# EAGLE board board (EAGLE 9.6.2)
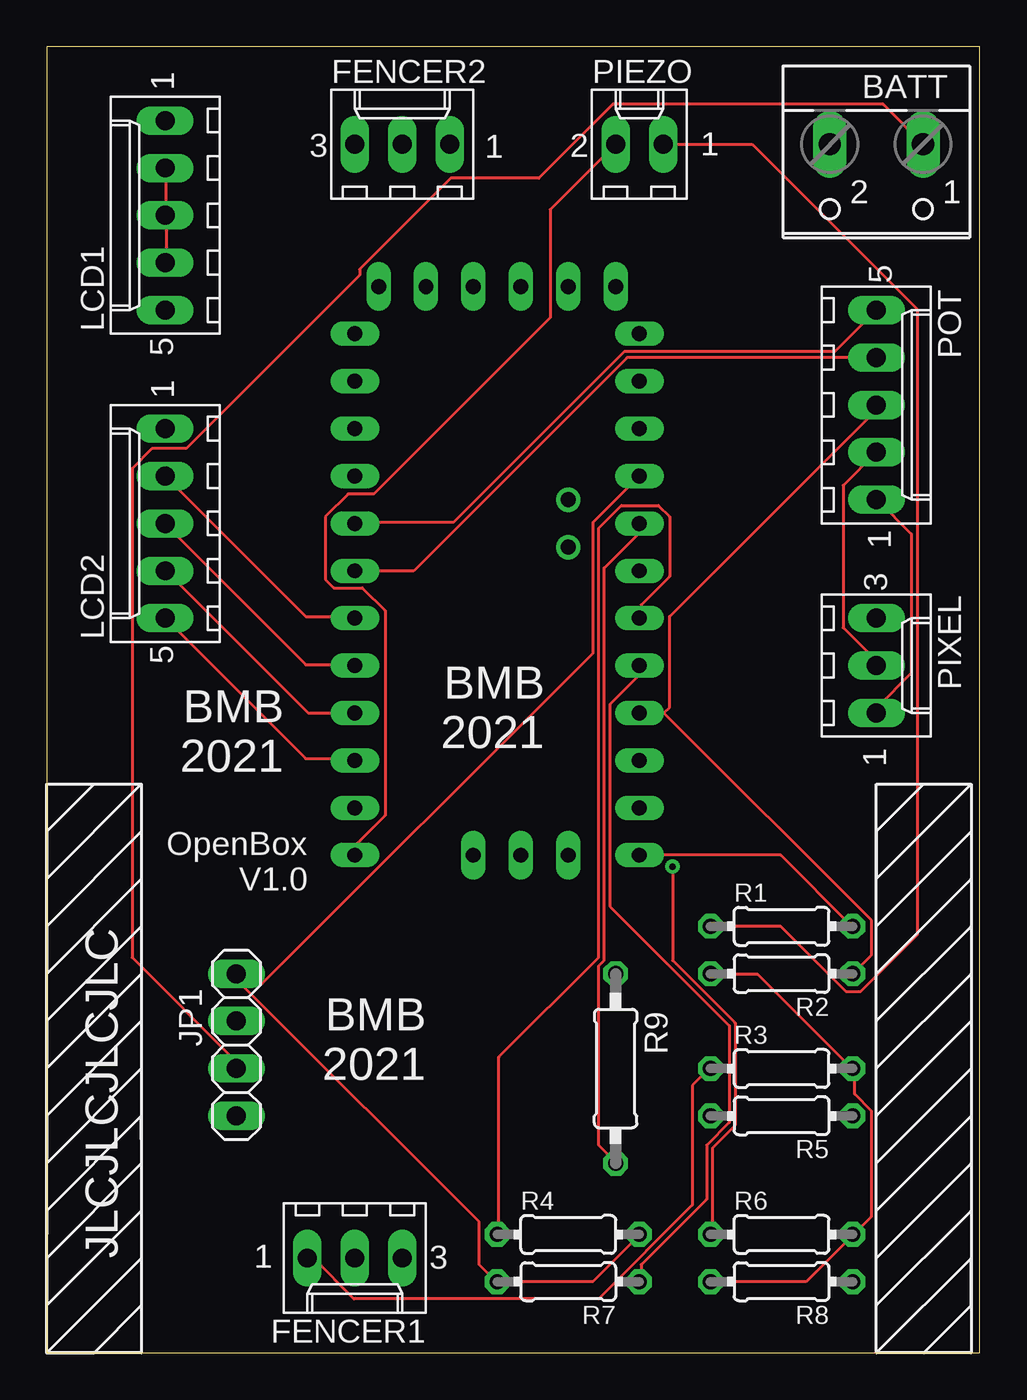
[diagram p0: board, top side]
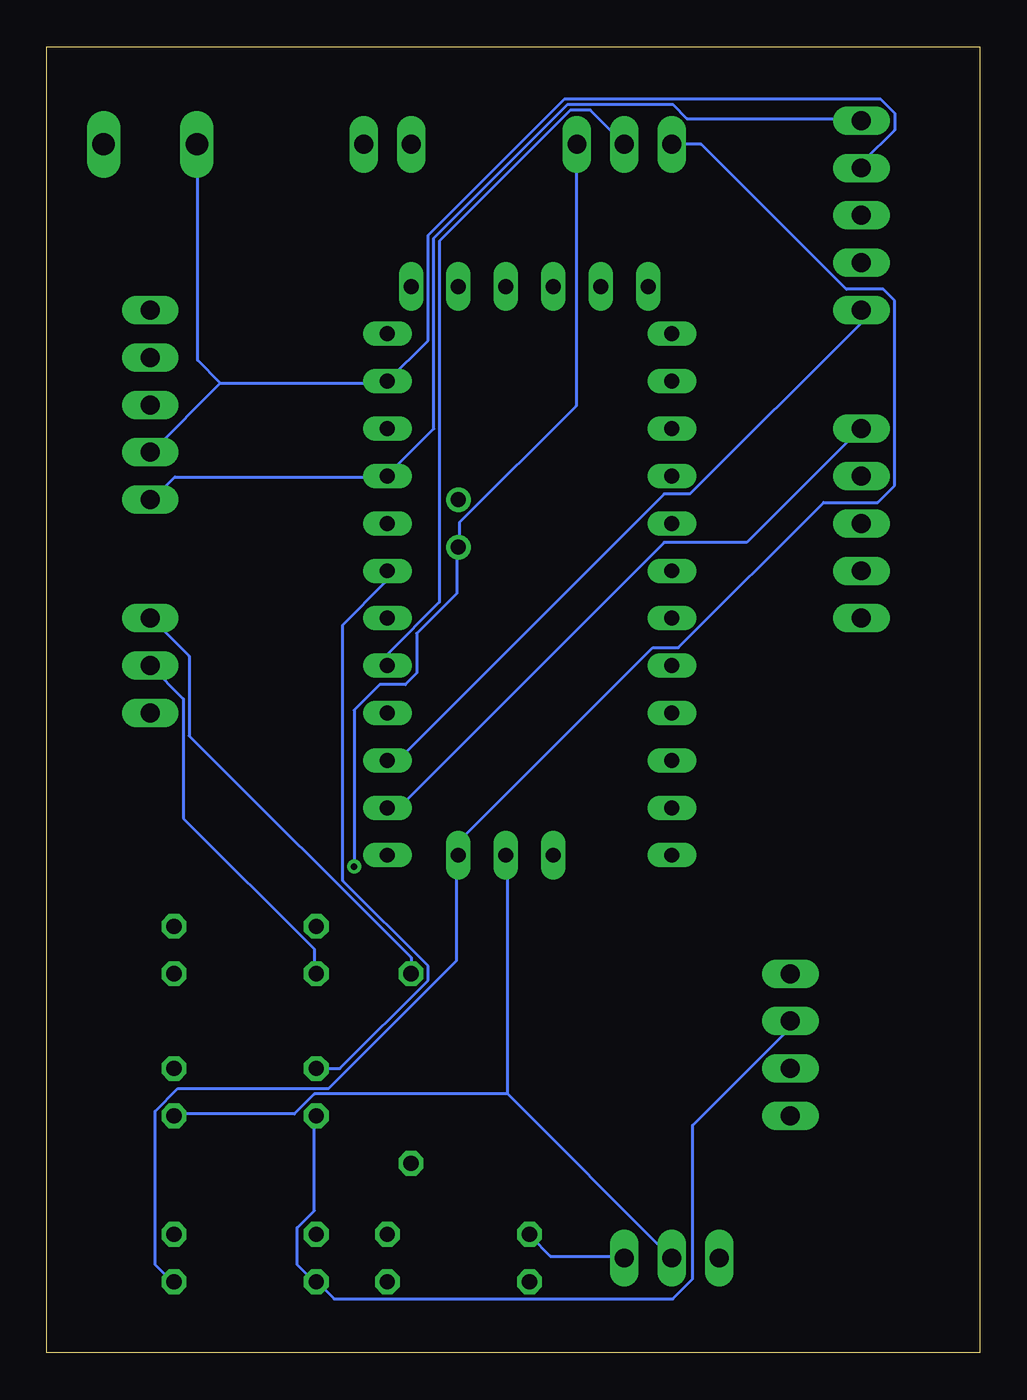
[diagram p1: board, bottom side, seen from below]

Size 50 x 70 mm. Coordinates in mm from the lower left corner, seen from the top.
Outline: 0,0 50,0 50,70 0,70 0,0
Copper layers (1*16): Top 0.035mm / dielectric 1.5mm / Bottom 0.035mm
Design rules "default": minimum track width 6mil, minimum drill 0.35mm, track to track 6mil, track to pad 6mil, pad to pad 6mil, via to via 6mil, smd to smd 6mil, copper to edge 40mil, drill to drill 6mil, minimum pad ring 10mil, minimum via ring 8mil, stop-mask expansion 4mil, vias tented up to drill 0mil, thermal gap 10mil

## Footprints (pad centres in the part's own frame; a part is rotated, then mirrored left to right if it is on the bottom)
W237-102 = drill 1.194 long: 1 -2.5,-1.27; 2 2.5,-1.27
6410-03 = drill 1.016 long: 1 2.54,0; 2 0,0; 3 -2.54,0
1X04 = drill 1.016 long: 1 -3.81,0; 2 -1.27,0; 3 1.27,0; 4 3.81,0
6410-05 = drill 1.016 long: 1 5.08,0; 2 2.54,0; 3 0,0; 4 -2.54,0; 5 -5.08,0
6410-02 = drill 1.016 long: 1 1.27,0; 2 -1.27,0
0204/7 = drill 0.813 octagon: 1 -3.81,0; 2 3.81,0
0207/10 = drill 0.813 octagon: 1 -5.08,0; 2 5.08,0
ABK-PRO-MINI = drill 0.8 long: A0 10.16,-3.81; A1 10.16,-6.35; A2 10.16,-8.89; A3 10.16,-11.43; A6 3.81,-21.59; A7 6.35,-21.59; D2 -5.08,-3.81; D3 -5.08,-6.35; D4 -5.08,-8.89; D5 -5.08,-11.43; D6 -5.08,-13.97; D7 -5.08,-16.51; D8 -5.08,-19.05; D9 -5.08,-21.59; D10 10.16,-21.59; D11 10.16,-19.05; D12 10.16,-16.51; D13 10.16,-13.97; DTR 8.89,8.89; GND 10.16,3.81; GND1 -5.08,-1.27; GND2 -3.81,8.89; GND3 -1.27,8.89; GND4 1.27,-21.59; RAW 10.16,6.35; RST 10.16,1.27; RST1 -5.08,1.27; RX1 -5.08,3.81; RX1-1 3.81,8.89; TX0 -5.08,6.35; TX0-1 6.35,8.89; VCC 10.16,-1.27; VCC1 1.27,8.89 | drill 0.8: A4 6.35,-5.08; A5 6.35,-2.54

## Placement (x,y rotation side)
BATT  [W237-102]  44.45,63.5 180 top
FENCER1  22-27-2031-03  [6410-03]  16.51,5.08 180 top
FENCER2  22-27-2031-03  [6410-03]  19.05,64.77 0 top
JP1  [1X04]  10.16,16.51 90 top
LCD1  22-27-2051-05  [6410-05]  6.35,60.96 90 top
LCD2  22-27-2051-05  [6410-05]  6.35,44.45 90 top
PIEZO  22-27-2021-02  [6410-02]  31.75,64.77 0 top
PIXEL  22-27-2031-03  [6410-03]  44.45,36.83 270 top
POT  22-27-2051-05  [6410-05]  44.45,50.8 270 top
R1  330  [0204/7]  39.37,22.86 0 top
R2  1000  [0204/7]  39.37,20.32 180 top
R3  1000  [0204/7]  39.37,15.24 0 top
R4  1300  [0204/7]  27.94,6.35 0 top
R5  1000  [0204/7]  39.37,12.7 180 top
R6  1000  [0204/7]  39.37,6.35 0 top
R7  1300  [0204/7]  27.94,3.81 180 top
R8  1000  [0204/7]  39.37,3.81 180 top
R9  330  [0207/10]  30.48,15.24 270 top
U$1  ABK-PRO-MINI  [ABK-PRO-MINI]  21.59,48.26 0 top

## Library data of the parts
BATT = con-wago-500; MPN: 237-102; OC_FARNELL: unknown; OC_NEWARK: 70K9898
FENCER1 FENCER2 LCD1 LCD2 PIEZO PIXEL POT = EP_molex_6410_7395
JP1 = pinhead
R1-R9 = rcl; SPICEPREFIX: R
U$1 = Arduino-clone

## Nets
N$1: JP1.4 LCD1.1 PIXEL.1 POT.1 R4.2 R7.2 U$1.VCC
N$2: BATT.2 JP1.3 LCD1.2 LCD1.3 LCD1.4 PIXEL.2 POT.2 R2.2 R3.2 R5.2 R6.2 R8.2 U$1.GND
N$3: BATT.1 JP1.2
N$4: LCD2.4 U$1.D6
N$5: LCD2.1 U$1.D11
N$6: LCD1.5 U$1.D12
N$7: LCD2.2 U$1.D4
N$8: LCD2.3 U$1.D5
N$9: LCD2.5 U$1.D7
N$10: PIEZO.2 U$1.D9
N$11: PIEZO.1 R1.1
N$12: R1.2 U$1.D10
N$13: POT.5 U$1.D2
N$14: POT.4 U$1.D3
N$15: FENCER1.1 R3.1 U$1.A1
N$16: POT.3 R2.1 U$1.D13
N$17: R9.2 U$1.A0
N$18: FENCER1.3 R4.1 U$1.A2
N$19: FENCER1.2 R5.1 U$1.A6
N$20: FENCER2.1 R6.1 U$1.A4
N$22: FENCER2.3 R8.1 U$1.A7
N$23: PIXEL.3 R9.1
N$24: FENCER2.2 R7.1 U$1.A3

## Tracks (layer width: path | path; a pad name or v marks a point on that pad's centre or on a via)
N$1
  Top 0.152: R4.2 31.7,6.25 29.26,3.81 R7.2 24.08,3.81 23.16,4.72 23.16,7.01 10.97,19.2 | 10.97,19.2 10.21,19.96 10.21,20.27 JP1.4 | PIXEL.1 44.5,34.29 44.5,34.59 46.33,36.42 46.33,43.89 44.5,45.72 POT.1 | 10.97,19.2 29.26,37.49 29.26,44.5 U$1.VCC
  Bottom 0.152: POT.1 44.35,45.72 43.13,46.94 31.85,46.94 U$1.VCC 31.7,47.09 29.26,49.53 29.26,59.74 22.1,66.9 16.46,66.9 15.7,66.14 6.4,66.14 LCD1.1
N$2
  Top 0.152: R2.2 35.66,20.27 38.1,20.27 43.13,15.24 R3.2 43.28,15.24 43.28,13.87 44.2,12.95 44.2,7.32 43.28,6.4 R6.2 43.13,6.25 40.69,3.81 R8.2 | 6.4,60.96 6.4,58.52 LCD1.4 | 6.4,60.96 6.4,63.4 LCD1.2 | 6.4,60.96 LCD1.3 | POT.2 42.67,46.48 42.67,38.86 44.35,37.19 44.35,36.88 PIXEL.2
  Bottom 0.152: R5.2 35.66,12.65 35.66,7.62 36.58,6.71 36.58,4.72 35.66,3.81 R8.2 35.51,3.81 34.59,2.9 16.46,2.9 15.39,3.96 15.39,12.19 10.21,17.37 10.21,17.68 JP1.3 | 40.69,51.97 31.85,51.97 U$1.GND 29.57,54.25 29.57,59.89 22.25,67.21 5.33,67.21 4.57,66.45 4.57,65.53 6.25,63.86 6.25,63.55 LCD1.2 | 40.69,51.97 44.35,48.31 POT.2 | 40.69,51.97 41.91,53.19 41.91,64.77 BATT.2 | PIXEL.2 42.67,35.05 42.67,28.65 35.66,21.64 35.66,20.42 R2.2
N$3
  Top 0.152: JP1.2 10.06,15.24 10.06,15.7 4.57,21.18 4.57,47.4 5.64,48.46 7.47,48.46 16.76,57.76 16.76,58.06 21.64,62.94 26.36,62.94 30.33,66.9 44.81,66.9 BATT.1
N$4
  Top 0.152: U$1.D6 14.02,34.29 6.4,41.91 LCD2.4
N$5
  Bottom 0.152: U$1.D11 31.7,29.26 31.09,29.26 16.92,43.43 12.5,43.43 6.4,49.53 LCD2.1
N$6
  Bottom 0.152: U$1.D12 31.7,31.85 31.09,31.85 16.92,46.02 15.54,46.02 6.4,55.17 6.4,55.78 LCD1.5
N$7
  Top 0.152: LCD2.2 13.87,39.47 16.46,39.47 U$1.D4
N$8
  Top 0.152: U$1.D5 16.46,36.88 13.87,36.88 6.4,44.35 LCD2.3
N$9
  Top 0.152: LCD2.5 13.87,31.85 16.46,31.85 U$1.D7
N$10
  Top 0.152: PIEZO.2 26.98,61.27 26.98,55.47 17.53,46.02 16.15,46.02 14.94,44.81 14.94,41.45 15.39,41 16.92,41 18.14,39.78 18.14,28.8 16.61,27.28 16.61,26.67 U$1.D9
N$11
  Top 0.152: R1.1 39.32,22.86 42.82,19.36 43.59,19.36 46.63,22.4 46.63,55.93 37.8,64.77 PIEZO.1
N$12
  Top 0.152: U$1.D10 39.32,26.67 43.13,22.86 R1.2
N$13
  Top 0.152: POT.5 42.22,53.65 30.94,53.65 21.79,44.5 16.61,44.5 U$1.D2
N$14
  Top 0.152: U$1.D3 19.66,41.91 31.09,53.34 POT.4
N$15
  Top 0.152: FENCER1.1 14.02,5.03 14.33,5.03 16.46,2.9 29.57,2.9 34.59,7.92 34.59,14.33 35.51,15.24 R3.1
  Bottom 0.152: R3.1 34.29,15.24 29.57,19.96 29.57,20.73 34.14,25.3 34.14,39.01 31.85,41.3 31.85,41.91 U$1.A1
N$16
  Top 0.152: 33.07,34.29 U$1.D13 | 33.07,34.29 44.2,23.16 44.2,21.34 R2.1 | 33.07,34.29 33.38,34.59 33.38,39.47 44.35,50.44 44.35,50.75 POT.3
N$17
  Top 0.152: U$1.A0 31.7,44.35 31.7,43.89 29.87,42.06 29.87,21.03 29.57,20.73 29.57,11.12 30.48,10.21 R9.2
N$18
  Top 0.152: U$1.A2 31.85,39.47 31.85,40.08 33.38,41.6 33.38,44.81 32.77,45.41 30.79,45.41 29.57,44.2 29.57,21.18 24.23,15.85 24.23,6.4 R4.1
  Bottom 0.152: FENCER1.3 19.05,5.18 23.01,5.18 24.08,6.25 R4.1
N$19
  Bottom 0.152: 25.3,13.87 25.3,26.67 U$1.A6 | FENCER1.2 25.3,13.87 | 25.3,13.87 35.66,13.87 36.73,12.8 43.13,12.8 R5.1
N$20  (via drill 0.35)
  Top 0.152: v33.53,26.06 33.53,21.03 36.88,17.68 36.88,12.19 35.66,10.97 35.66,6.4 R6.1
  Bottom 0.152: FENCER2.1 21.64,64.77 21.64,50.75 27.89,44.5 27.89,43.28 U$1.A4 28.04,43.13 28.04,40.69 30.18,38.56 30.18,36.42 30.79,35.81 32.16,35.81 33.53,34.44 v33.53,26.06
N$22
  Bottom 0.152: R8.1 43.28,3.81 44.2,4.72 44.2,12.95 42.98,14.17 34.9,14.17 28.04,21.03 28.04,26.67 U$1.A7 27.89,26.67 27.89,27.43 17.53,37.8 16.15,37.8 8.38,45.57 5.49,45.57 4.57,46.48 4.57,56.39 5.18,57 7.16,57 14.94,64.77 FENCER2.3
N$23
  Bottom 0.152: R9.1 30.48,21.18 42.37,33.07 42.37,37.34 44.35,39.32 PIXEL.3
N$24
  Top 0.152: R7.1 31.85,3.81 31.85,4.72 35.36,8.23 35.36,11.12 36.58,12.34 36.58,17.53 30.18,23.93 30.18,34.75 31.7,36.27 31.7,36.73 U$1.A3
  Bottom 0.152: FENCER2.2 20.88,66.6 21.95,66.6 28.96,59.59 28.96,40.23 31.7,37.49 31.7,36.88 U$1.A3

## Text on the board
tPlace: BMB / 2021 | BMB / 2021 | OpenBox / V1.0 | BMB / 2021 | JLCJLCJLCJLC